# Altium PCB BlinkLight.PcbDoc
Units mil, origin at the board's own origin, x right, y up, seen from the top; angles counter-clockwise.
Board outline 1295 x 400 mil, 2 copper layers (Top Layer, Bottom Layer); 10 components, 10 nets, 32 pads, 0 vias.
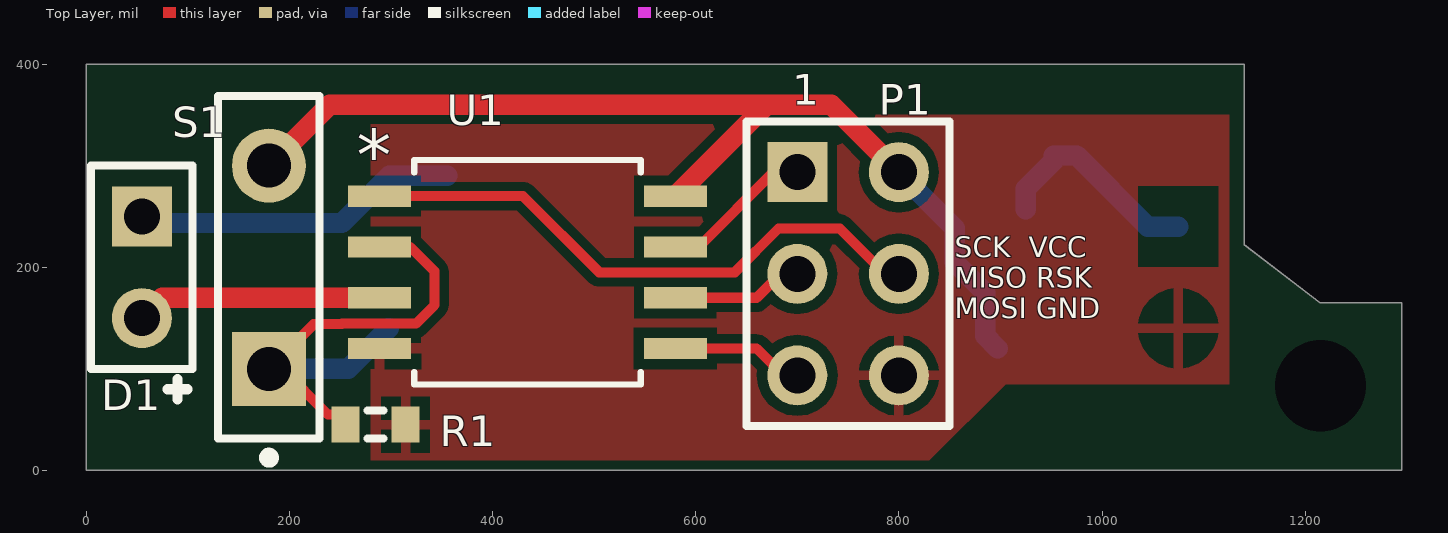
[diagram p0: Top Layer view]
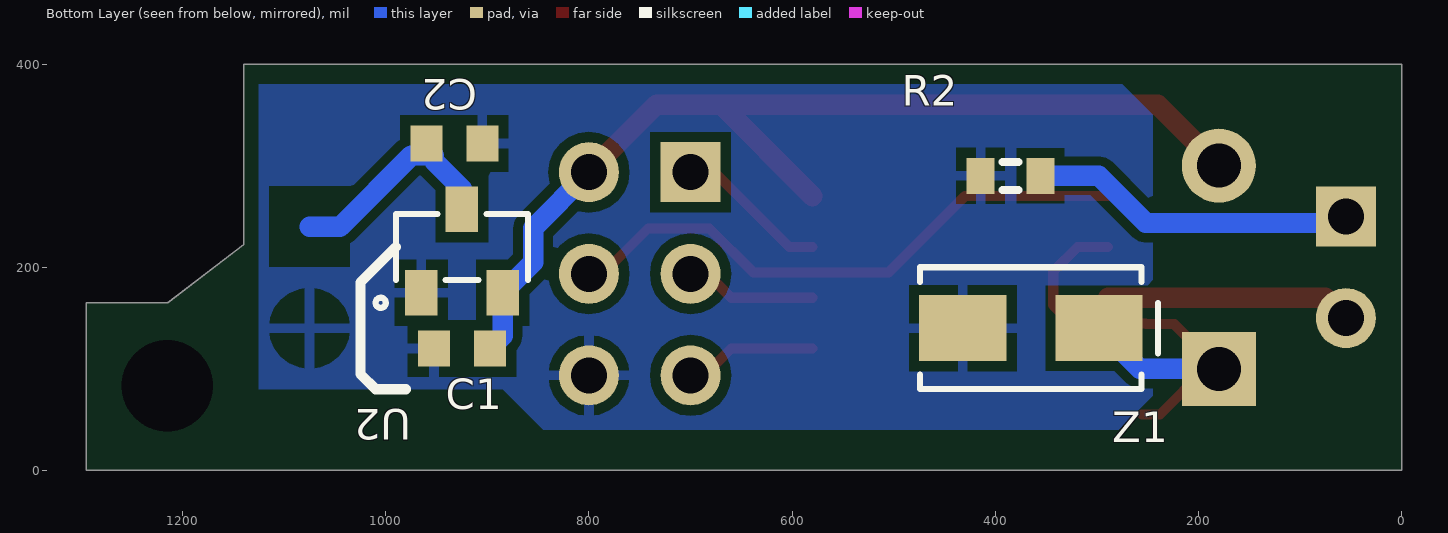
[diagram p1: Bottom Layer view, seen from below]

## Layer stack, top to bottom
Top Solder: solder mask 0.4, Solder Resist, Dk 3.5
Top Layer: signal copper 1.4
Dielectric 1: dielectric 12.6, FR-4, Dk 4.8
Bottom Layer: signal copper 1.4
Bottom Solder: solder mask 0.4, Solder Resist, Dk 3.5

## Board outline
1140,222.06 1214.62,165 1295,165 1295,0 0,0 0,400 1140,400

## Design rules (kind name [scope] priority, off if disabled: settings)
Clearance [All] p1: gap=10 ignorepadtopadclearanceinfootprint=FALSE except(0: Arc-Hole Track-Hole SMDPad-Hole THPad-Hole Via-Hole Fill-Hole Poly-Hole Region-Hole Text-Hole; 9: Arc-SMDPad Arc-Fill Arc-Poly Arc-Region Track-SMDPad Track-Fill Track-Poly Track-Region)
PolygonConnect [All] p1: connectstyle=Relief reliefconductorwidth=10 reliefentries=4 polygonreliefangle="90 Angle" airgapwidth=10
RoutingVias [All] p1: holewidth=28 width=50 viastyle="Through Hole" minholewidth=28 minwidth=50 maxholewidth=28 maxwidth=50
SolderMaskExpansion [All] p1: expansion=4
Width [All] p1: maxlimit=60 minlimit=10 preferedwidth=10 minimp=50.000000 maximp=50.000000 favimp=50.000000
30 further rules are at their usual default settings.

## Components (designator, comment, footprint, x,y, rotation, side; value= is the part's Value field where it differs from the comment)
C1 "Cap Semi" 1608[0603] 925,120 r180 bottom value=1uF
C2 "Cap Semi" 1608[0603] 932.56,321.76 r0 bottom value=1uF
D1 "white, 3.2 V, 20 mA" HDR1X2 55,250 r270 top
P1 "Header 3X2" HDR2X3 700,293.57 r270 top
R1 "Res3" J1-0603 285,45 r180 top value=100K
R2 "Res3" J1-0603 385,290 r180 bottom value=5
S1 "SW-PB" SPST-2 180,200 r90 top
U1 "ATTiny85" 8S2 434.5,195 r0 top
U2 "AP2120N-3.3TRG1" SOT-23 925,220 r180 bottom value=Value
Z1 "SMAJ5.0A, TVS" SMASERIES 365,140 r0 bottom

## Footprints (in the part's own frame and the unit in brackets; to place one, negate y for a bottom-side part, rotate by r counter-clockwise, add the part's x,y. Pads: shape width x height; smd on the part's side, far side on the other; paste and mask are expansions set on the pad)
8S2 [mil]
  rect 62x21 smd paste+0 mask+0: 1(-145.5,75) 2(-145.5,25) 3(-145.5,-25) 4(-145.5,-75) 5(145.5,-75) 6(145.5,-25) 7(145.5,25) 8(145.5,75)
  silkscreen extent -112,-110 112,110, body extent -157,-105 167,106, height 85
1608[0603] [mm] "Chip Capacitor, Body 1.6x0.8mm, IPC High Density"
  rect 0.8x0.9 smd: 1(-0.7,0) 2(0.7,0)
  body extent -0.87,-0.48 0.87,0.48, height 1.3
HDR1X2 [mm] "Connector; Header; 2 Position"
  rect 1.5x1.5 hole 0.9: 1(0,0)
  round 1.5 hole 0.9: 2(2.54,0)
  silkscreen extent -1.27,-1.27 4.57,1.27
HDR2X3 [mm] "Connector; Header; 3x2 Position"
  rect 1.5x1.5 hole 0.9: 1(0,0)
  round 1.5 hole 0.9: 2(0,2.54) 3(2.54,0) 4(2.54,2.54) 5(5.08,0) 6(5.08,2.54)
  silkscreen extent -1.27,-1.27 6.35,3.81
J1-0603 [mm] "Chip Resistor, Body 1.6x0.8mm, IPC High Density"
  rect 0.7x0.9 smd: 1(-0.75,0) 2(0.75,0)
  silkscreen extent -0.2,-0.35 0.2,0.35, body extent -0.85,-0.48 0.85,0.48, height 0.9
SMASERIES [mil]
  rect 86x65 smd paste+0 mask+0: 1(-67,0) 2(67,0)
  silkscreen extent -125,-60 109,60, body extent -104,-55 104,55, height 92
SOT-23 [mil]
  rect 32x45 smd paste+0 mask+0: 1(-40,-45) 2(40,-45) 3(0,37.2)
  silkscreen extent -85,-60 65,33, body extent -58,-62 60,50, height 47
SPST-2 [mm] "Switch; 2 Leads"
  rect 1.85x1.85 hole 1.1: 1(-2.54,0)
  round 1.85 hole 1.1: 2(2.54,0)
  silkscreen extent -4.89,-1.27 4.28,1.27

## Part data
C1 C2: "Capacitor (Semiconductor SIM Model)", LatestRevisionDate=29-May-2009, LatestRevisionNote="IPC-7351 Footprint Added.", PackageDescription="Chip Capacitor", PackageReference=C1206, Published=8-Jun-2000, Publisher="Altium Limited"
D1: library part LED2, "Typical RED, GREEN, YELLOW, AMBER GaAs LED", LatestRevisionDate=17-Jul-2002, LatestRevisionNote="Re-released for DXP Platform.", PackageDescription="SM LED; 2 Flat Leads", PackageReference=3.2X1.6X1.1, PackageVersion=Feb-2002, Published=8-Jun-2000, Publisher="Altium Limited"
P1: "Header, 3-Pin, Dual row", LatestRevisionDate=17-Jul-2002, LatestRevisionNote="Re-released for DXP Platform.", Publisher="Altium Limited"
R1 R2: "Resistor", LatestRevisionDate=29-May-2009, LatestRevisionNote="IPC-7351 Footprint Added.", PackageDescription="Chip Resistor", PackageReference=J1-0603, Published=8-Jun-2000, Publisher="Altium Limited"
S1: "Switch", LatestRevisionDate=17-Jul-2002, LatestRevisionNote="Re-released for DXP Platform.", PackageDescription="Switch; 2 Leads", PackageReference=SPST-2, Published=24-Mar-1999, Publisher="Altium Limited"
U2: "IC REG LINEAR 3.3V 150MA SOT23", Built_By=EMA_UL_Team, Manufacturer_Part_Number=AP2120N-3.3TRG1, RefDes=RefDes, Type=DEV, Vendor="Diodes Inc"
Z1: library part SMAJ5.0A, "TVS Diode 5V 9.2V DO214AC", Category="TVS Diode", ComponentLink1Description="Supplier Link", ComponentLink1URL=https://www.digikey.com/product-detail/en/littelfuse-inc/SMAJ5.0A/SMAJ5.0ALFCT-ND/762462, Manufacturer Part Number=SMAJ5.0A, Type=Zener

## Free pads (board coordinates)
  round 60 hole 90 unplated: 2(1215,83.25)

## Nets (pads, with @x,y where several pads share a name; then routed paths per layer and width w, separated by ;. In a path a pad name is that pad's centre, name@x,y a point inside that pad or via, vN(x,y) a via of type N, cw(c..) or ccw(c..) an arc to the next point about the centre after c; other vN are vias at no path point)
GND: C1.1 C2.1 P1.6 R1.1 R2.1 U1.4 U2.1 Z1.2
MISO: P1.3 U1.6 | length 136.6
  Top Layer w10: U1.6 660,170 685,195 P1.3@700,180
MOSI: P1.5 U1.5 | length 136.6
  Top Layer w10: U1.5 660,120 P1.5@700,80
NetD1_1: D1.1 R2.2 | length 326.1
  Bottom Layer w20: D1.1 55,243.58 251.97,243.58 298.39,290 R2.2
NetD1_2: D1.2 U1.3 | length 242.3
  Top Layer w20: D1.2 75,170 U1.3
NetR1_2: R1.2 S1.1 U1.2 Z1.1 | length 514.9
  Top Layer w10: R1.2@255.47,55 238,55 193,100 S1.1 224,144 251.7,144 252.2,144.5 324.8,144.5 343,162.7 343,196 319,220 U1.2
  Bottom Layer w20: S1.1 258,100 Z1.1
RST: P1.4 U1.1 | length 584
  Top Layer w10: U1.1 430,270 505,195 638.46,195 681.56,238.1 741.9,238.1 P1.4@800,180
SCK: P1.1 U1.7 | length 156
  Top Layer w10: U1.7 603,220 676.5,293.5 681.67,293.5 695.17,280 P1.1@700,280
VBAT: C2.2 U2.3 | length 215.6
  Bottom Layer w20: U2.3 925,277.22 952.56,304.78 952.56,310 975,310 1045,240 1075,240
VCC: C1.2 P1.2 S1.2 U1.8 U2.2 | length 1013.6
  Top Layer w20: S1.2 240,360 670,360 ; U1.8 670,360 ; P1.2 733.57,360 670,360
  Bottom Layer w20: P1.2 855,238.57 855,205 U2.2 885,132.44 C1.2

## Polygon pours and split planes (outlines as drawn)
GND on Bottom Layer "Bottom Layer-GND" (solid, pour order 0): 275,380 245,350 245,73.39 278.39,40 845,40 885,80 1125,80 1125,380
GND on Top Layer "Top Layer-GND" (solid, pour order 2): 280,350 280,10 830,10 905,85 1125,85 1125,350

## Silkscreen, mask and mechanical layers (free items; w line width, h text height)
Top Overlay:
  text "SCK  VCC / MISO RSK / MOSI GND" at 855,150 h20
Bottom Overlay:
  lines w10: 980,80 1010,80 1025,95 ; 990.04,220 1025,185.04 1025,95 ; 1015,85 1025,95

## Text inside footprints (layer, text, board x,y; h text height)
P1: Top Overlay "1" at 695,360 h30
U1: Top Overlay "*" at 266.5,286 h50; Mechanical 13 "*" at 330.5,247.5 h50